# Altium PCB ledstripes.PcbDoc
Units mil, origin at the board's own origin, x right, y up, seen from the top; angles counter-clockwise.
Board outline 1375 x 1377.95 mil, 2 copper layers (Top Layer, Bottom Layer), stack 65.792 mil thick; 33 components, 28 nets, 89 pads, 0 vias.
Unrouted connection lines stored in the file: 21.
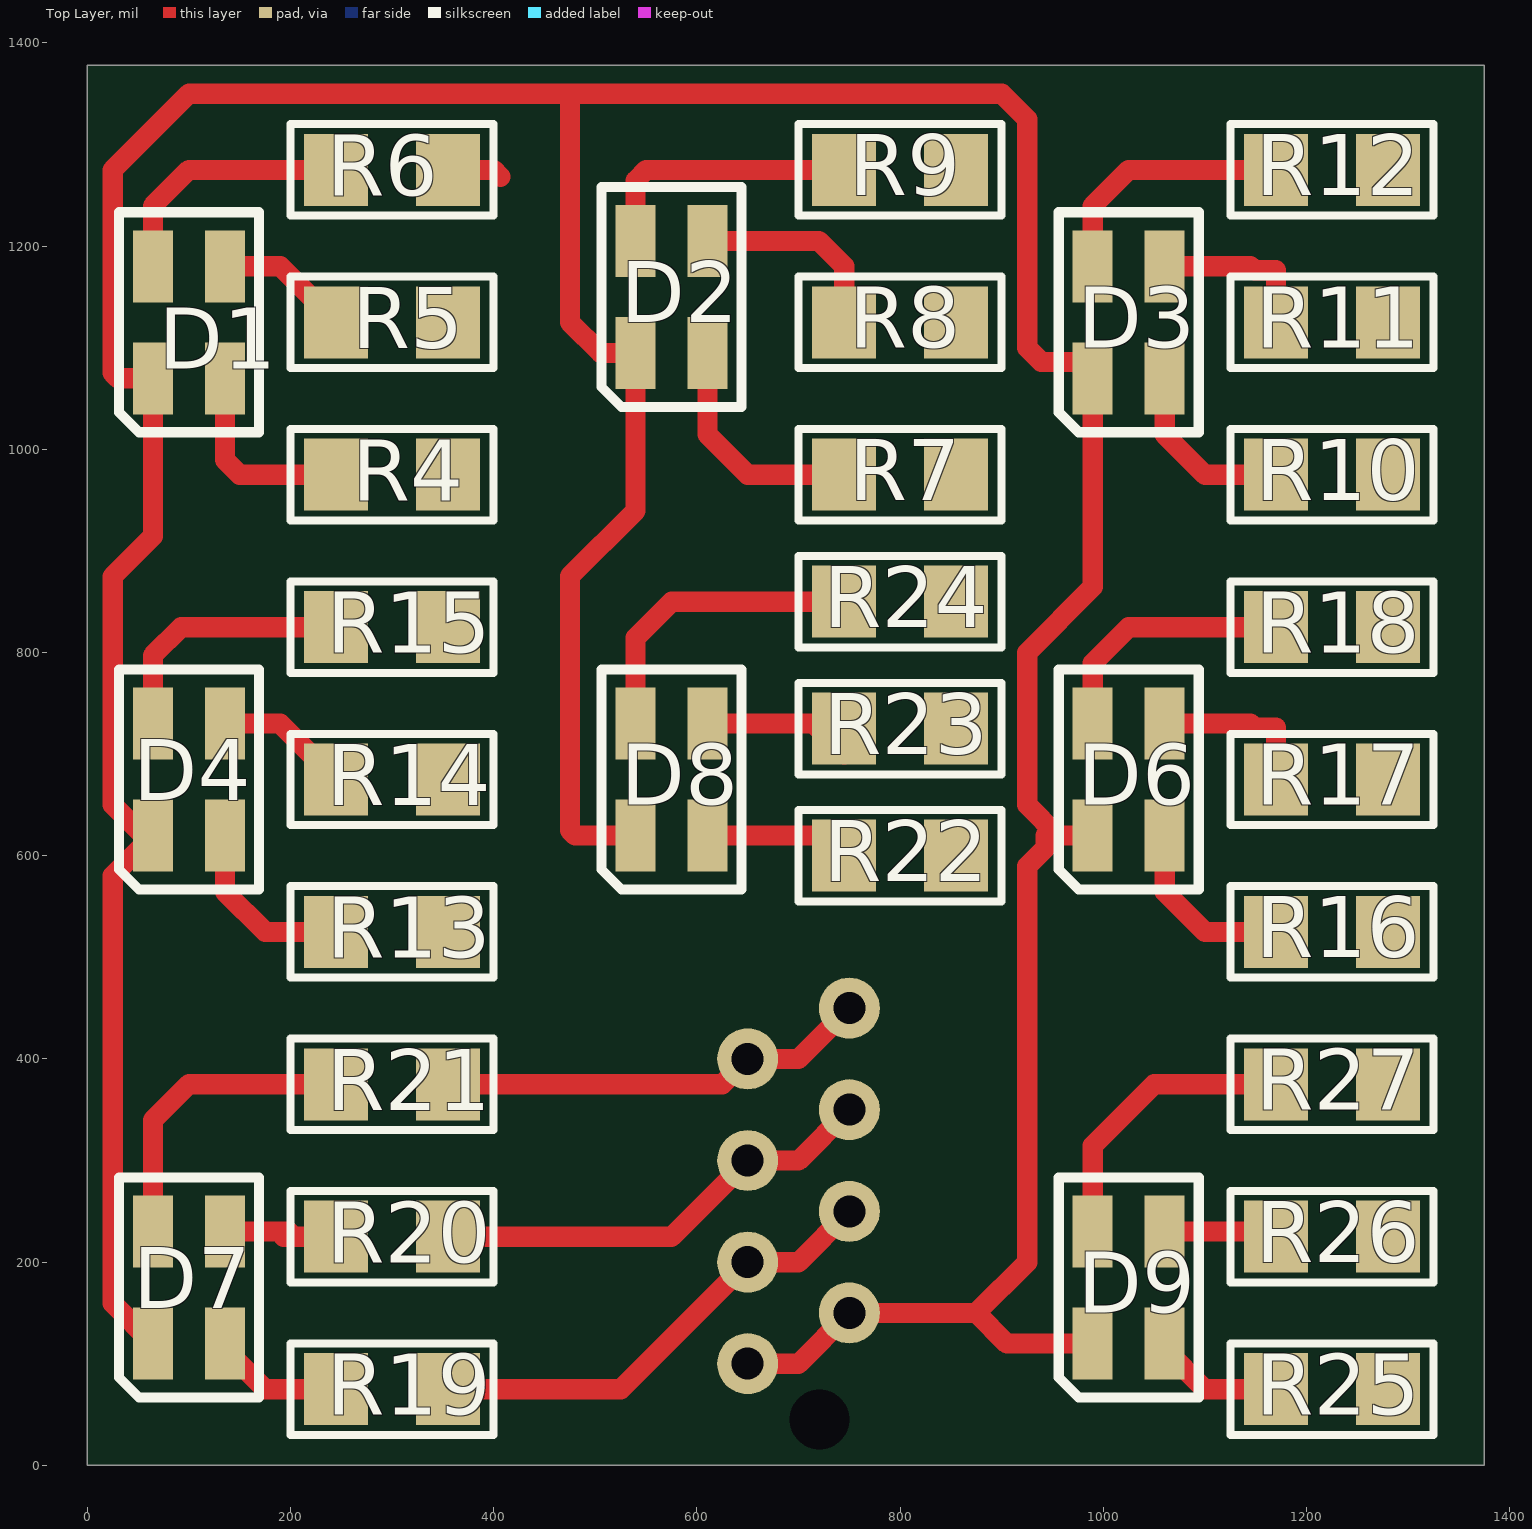
[diagram p0: Top Layer view]
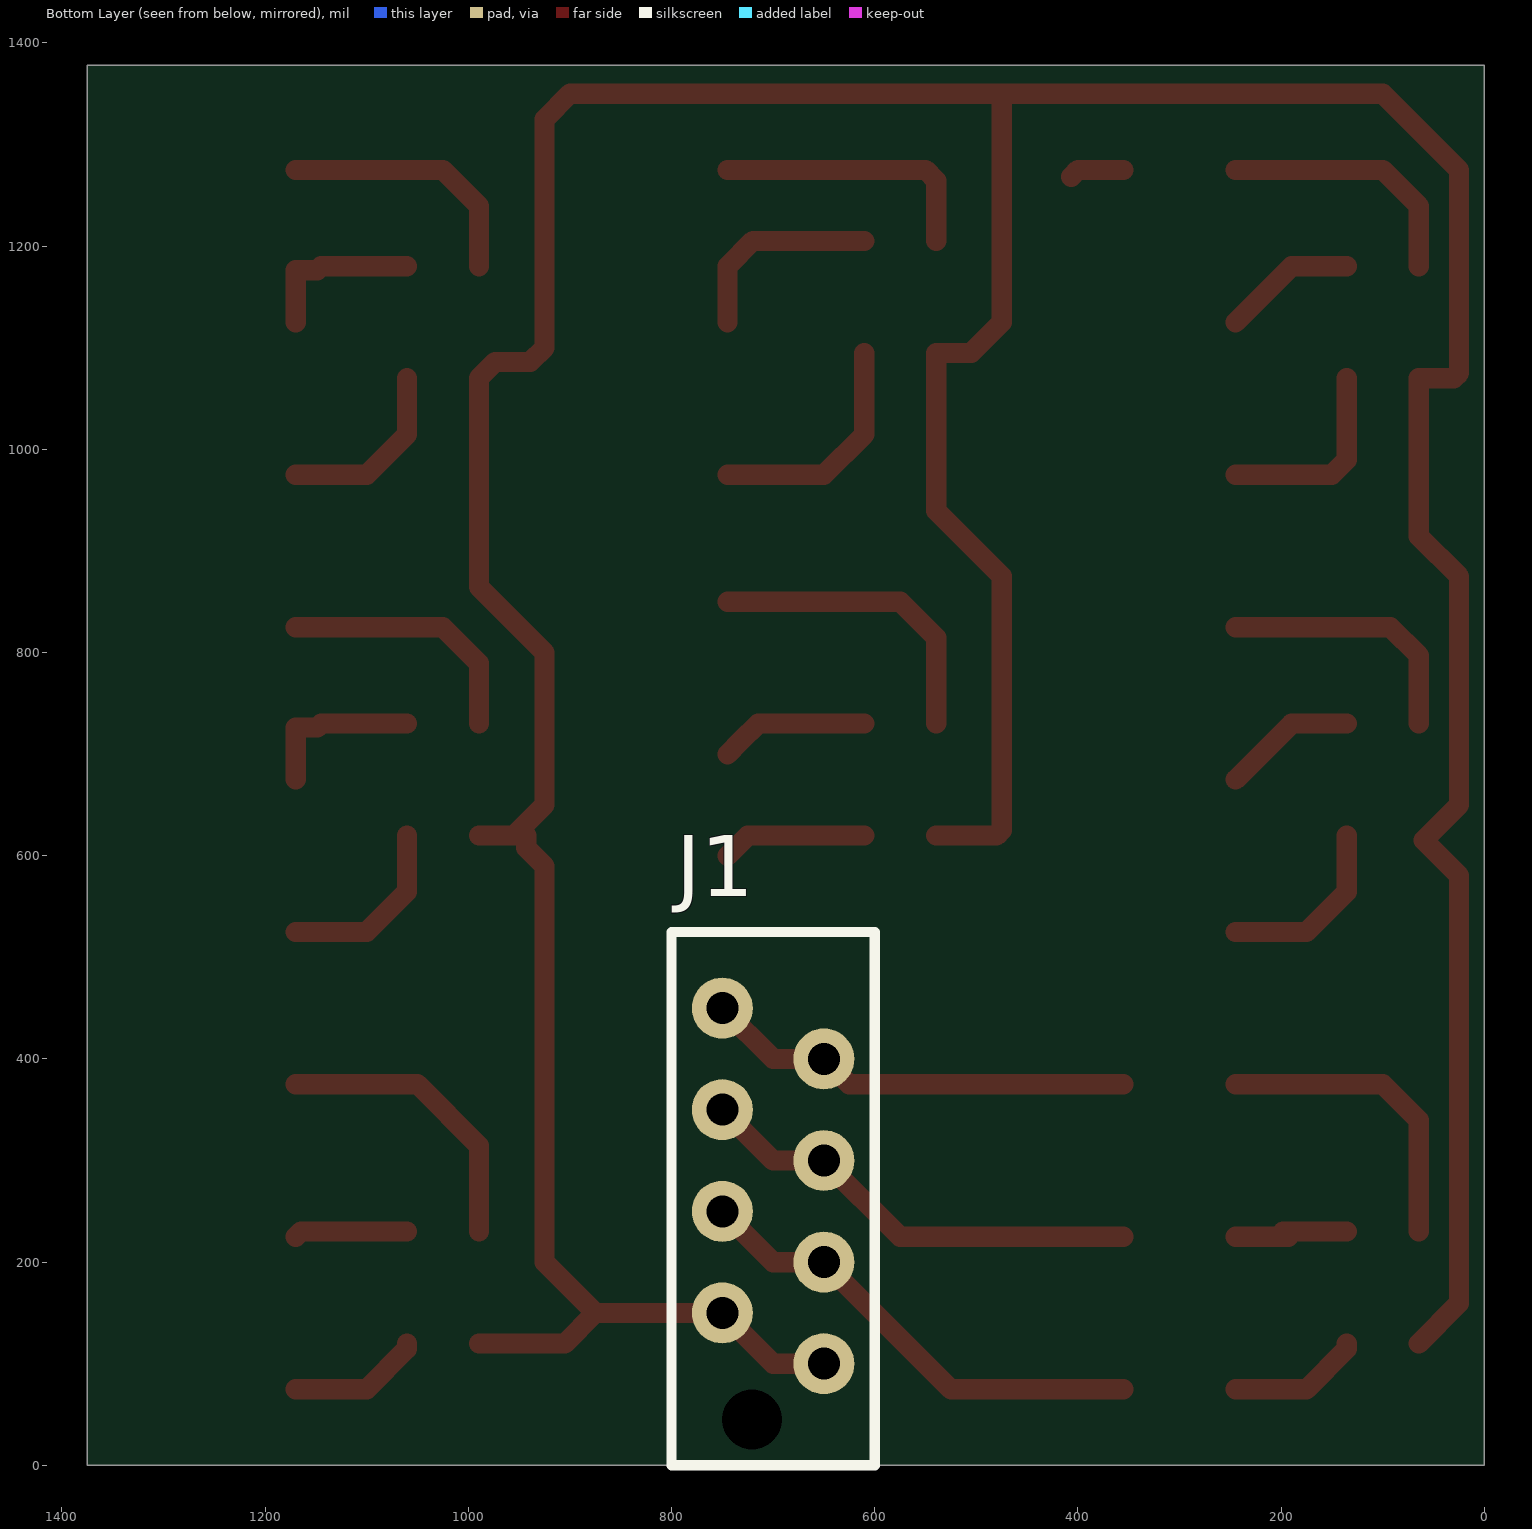
[diagram p1: Bottom Layer view, seen from below]

## Layer stack, top to bottom
Top Layer: signal copper 1.4
Dielectric: core 62.9921, FR-4, Dk 4.8
Bottom Layer: signal copper 1.4

## Board outline
0,0 0,1377.95 1375,1377.95 1375,0

## Design rules (kind name [scope] priority, off if disabled: settings)
Clearance [All] p1: gap=10
HoleSize [All] p1: absolutevalues=TRUE maxlimit=118.11 minlimit=23.62 maxpercent=80.000 minpercent=20.000
PolygonConnect [All] p1: connectstyle=Relief reliefconductorwidth=10 reliefentries=4 polygonreliefangle="90 Angle"
RoutingVias [All] p1: holewidth=28 width=50 viastyle="Through Hole" minholewidth=28 minwidth=50 maxholewidth=28 maxwidth=50
SilkscreenOverComponentPads [All] p1: minsilkscreentomaskgap=10
SolderMaskExpansion [All] p1: expansion=4
Width [All] p1: maxlimit=20 minlimit=10 preferedwidth=20
26 further rules are at their usual default settings.

## Components (designator, comment, footprint, x,y, rotation, side; value= is the part's Value field where it differs from the comment)
D1 "NECM325C" D_NECM325C 100,1125 r270 top
D2 "NECM325C" D_NECM325C 575,1150 r270 top
D3 "NECM325C" D_NECM325C 1025,1125 r270 top
D4 "NECM325C" D_NECM325C 100,675 r270 top
D6 "NECM325C" D_NECM325C 1025,675 r270 top
D7 "NECM325C" D_NECM325C 100,175 r270 top
D8 "NECM325C" D_NECM325C 575,675 r270 top
D9 "NECM325C" D_NECM325C 1025,175 r270 top
J1 "CNFLC08M_TBD" J_215079-8 650,100 r270 bottom
R4 "YRES150E" R_1206 300,975 r180 top
R5 "YRES150E" R_1206 300,1125 r180 top
R6 "YRES68E_TBD" R_1206 300,1275 r180 top
R7 "YRES150E" R_1206 800,975 r180 top
R8 "YRES150E" R_1206 800,1125 r180 top
R9 "YRES68E_TBD" R_1206 800,1275 r180 top
R10 "YRES150E" R_1206 1225,975 r180 top
R11 "YRES150E" R_1206 1225,1125 r180 top
R12 "YRES68E_TBD" R_1206 1225,1275 r180 top
R13 "YRES150E" R_1206 300,525 r180 top
R14 "YRES150E" R_1206 300,675 r180 top
R15 "YRES68E_TBD" R_1206 300,825 r180 top
R16 "YRES150E" R_1206 1225,525 r180 top
R17 "YRES150E" R_1206 1225,675 r180 top
R18 "YRES68E_TBD" R_1206 1225,825 r180 top
R19 "YRES150E" R_1206 300,75 r180 top
R20 "YRES150E" R_1206 300,225 r180 top
R21 "YRES68E_TBD" R_1206 300,375 r180 top
R22 "YRES150E" R_1206 800,600 r180 top
R23 "YRES150E" R_1206 800,725 r180 top
R24 "YRES68E_TBD" R_1206 800,850 r180 top
R25 "YRES150E" R_1206 1225,75 r180 top
R26 "YRES150E" R_1206 1225,225 r180 top
R27 "YRES68E_TBD" R_1206 1225,375 r180 top

## Footprints (in the part's own frame and the unit in brackets; to place one, negate y for a bottom-side part, rotate by r counter-clockwise, add the part's x,y. Pads: shape width x height; smd on the part's side, far side on the other; paste and mask are expansions set on the pad)
D_NECM325C [mm] "RGB-LED"
  rect 1.8x1 smd: 1(-1.4,0.9) 2(-1.4,-0.9) 3(1.4,-0.9) 4(1.4,0.9)
  silkscreen extent -2.75,-1.75 2.75,1.75
J_215079-8 [mil] "MicroMatch 8p through hole vertical"
  round 0 hole 59.06 unplated mask+29.53: 0(55.12,-70.87)
  round 60 hole 31.5: 1(0,0) 2(-50,-100) 3(-100,0) 4(-150,-100) 5(-200,0) 6(-250,-100) 7(-300,0) 8(-350,-100)
  silkscreen extent -425,-150 100,50, body extent -413,-148 63,48, height 157
R_1206 [mm] "Chip Resistor; Body 3.2 x 1.6 mm (LxW typ)"
  rect 1.6x1.8 smd: 1(-1.4,0) 2(1.4,0)
  silkscreen extent -2.54,-1.14 2.54,1.14

## Part data
J1: library part CNFLC08F_TBD, "*"
R4 R5 R6 R7 R8 R9 R10 R11 R12 R13 R14 R15 R16 R17 R18 R19 R20 R21 R22 R23 R24 R25 R26 R27: "Resistor"

## Nets (pads, with @x,y where several pads share a name; then routed paths per layer and width w, separated by ;. In a path a pad name is that pad's centre, name@x,y a point inside that pad or via, vN(x,y) a via of type N, cw(c..) or ccw(c..) an arc to the next point about the centre after c; other vN are vias at no path point)
+5V: D1.3 D2.3 D3.3 D4.3 D6.3 D7.3 D8.3 D9.3 J1.1 J1.2 | length 4769
  Top Layer w20: D7.3 25,159.45 25,186.16 24.88,186.28 24.88,580.2 59.84,615.16 24.88,650.12 24.88,874.88 64.57,914.57 D1.3 30.12,1069.88 24.88,1075.12 24.88,1223.95 25,1224.07 25,1275 100,1350 475,1350 ; D8.3 480.12,619.88 475,625 475,875 539.57,939.57 D2.3 505.12,1094.88 475,1125 475,1350 ; J1.1 700,100 J1.2 875,150 ; D9.3 905.12,119.88 875,150 ; D6.3 955.12,619.88 ; 475,1350 900,1350 925,1325 925,1100 938.98,1086.02 973.43,1086.02 D3.3 989.57,864.57 925,800 925,650 955.12,619.88 ; 875,150 925,200 925,589.76 943.11,607.87 943.11,619.88 955.12,619.88
NetD1_1: D1.1 R5.2 | length 132.3
  Top Layer w20: D1.1 189.76,1180.12 R5.2
NetD1_2: D1.2 R6.2 | length 254.4
  Top Layer w20: D1.2 64.57,1239.57 100,1275 R6.2
NetD1_4: D1.4 R4.2 | length 195.8
  Top Layer w20: D1.4 135.43,989.57 150,975 R4.2
NetD2_1: D2.1 R8.2 | length 199.9
  Top Layer w20: D2.1 719.88,1205.12 744.88,1180.12 R8.2
NetD2_2: D2.2 R9.2 | length 269.1
  Top Layer w20: D2.2 539.57,1264.57 550,1275 R9.2
NetD2_4: D2.4 R7.2 | length 231.2
  Top Layer w20: D2.4 610.43,1014.57 650,975 R7.2
NetD3_1: D3.1 R11.2 | length 162.3
  Top Layer w20: D3.1 1144.88,1180.12 1148.82,1176.18 1169.88,1176.18 R11.2
NetD3_2: D3.2 R12.2 | length 254.4
  Top Layer w20: D3.2 989.57,1239.57 1025,1275 R12.2
NetD3_4: D3.4 R10.2 | length 181.2
  Top Layer w20: D3.4 1060.43,1014.57 1100,975 R10.2
NetD4_1: D4.1 R14.2 | length 132.3
  Top Layer w20: D4.1 189.76,730.12 R14.2
NetD4_2: D4.2 R15.2 | length 258.9
  Top Layer w20: D4.2 64.57,797.14 92.43,825 R15.2
NetD4_4: D4.4 R13.2 | length 181.2
  Top Layer w20: D4.4 135.43,564.57 175,525 R13.2
NetD6_1: D6.1 R17.2 | length 162.3
  Top Layer w20: D6.1 1144.88,730.12 1148.82,726.18 1169.88,726.18 R17.2
NetD6_2: D6.2 R18.2 | length 254.4
  Top Layer w20: D6.2 989.57,789.57 1025,825 R18.2
NetD6_4: D6.4 R16.2 | length 181.2
  Top Layer w20: D6.4 1060.43,564.57 1100,525 R16.2
NetD7_1: D7.1 R20.2 | length 121.8
  Top Layer w20: D7.1 198.23,230.12 193.11,225 R20.2
NetD7_2: D7.2 R21.2 | length 304.4
  Top Layer w20: D7.2 64.57,339.57 100,375 R21.2
NetD7_4: D7.4 R19.2 | length 131.2
  Top Layer w20: D7.4 135.43,114.57 175,75 R19.2
NetD8_1: D8.1 R23.2 | length 146.9
  Top Layer w20: D8.1 714.76,730.12 732.38,712.5 R23.2@744.88,700
NetD8_2: D8.2 R24.2 | length 304.4
  Top Layer w20: D8.2 539.57,814.57 575,850 R24.2
NetD8_4: D8.4 R22.2 | length 142.7
  Top Layer w20: D8.4 725,619.88 R22.2
NetD9_1: D9.1 R26.2 | length 111.6
  Top Layer w20: D9.1 1164.76,230.12 R26.2
NetD9_2: D9.2 R27.2 | length 289.8
  Top Layer w20: D9.2 989.57,314.57 1050,375 R27.2
NetD9_4: D9.4 R25.2 | length 131.2
  Top Layer w20: D9.4 1060.43,114.57 1100,75 R25.2
NetJ1_3: J1.3 J1.4 R4.1 R7.1 R10.1 R13.1 R16.1 R19.1 R22.1 R25.1 | length 467.4
  Top Layer w20: R19.1 525,75 J1.3 700,200 J1.4
NetJ1_5: J1.5 J1.6 R5.1 R8.1 R11.1 R14.1 R17.1 R20.1 R23.1 R26.1 | length 446.7
  Top Layer w20: R20.1 575,225 J1.5 700,300 J1.6
NetJ1_7: J1.7 J1.8 R6.1 R9.1 R12.1 R15.1 R18.1 R21.1 R24.1 R27.1 | length 480.2
  Top Layer w20: R21.1 625,375 J1.7 700,400 J1.8 ; R6.1 400,1275 406.61,1268.39
pads on no net: J1.0